# Altium PCB Bottom_PCB.PcbDoc
Units mm, origin at the board's own origin, x right, y up, seen from the top; angles counter-clockwise.
Board outline 56 x 75 mm, 2 copper layers (Top Layer, Bottom Layer); 35 components, 48 nets, 131 pads, 31 vias.
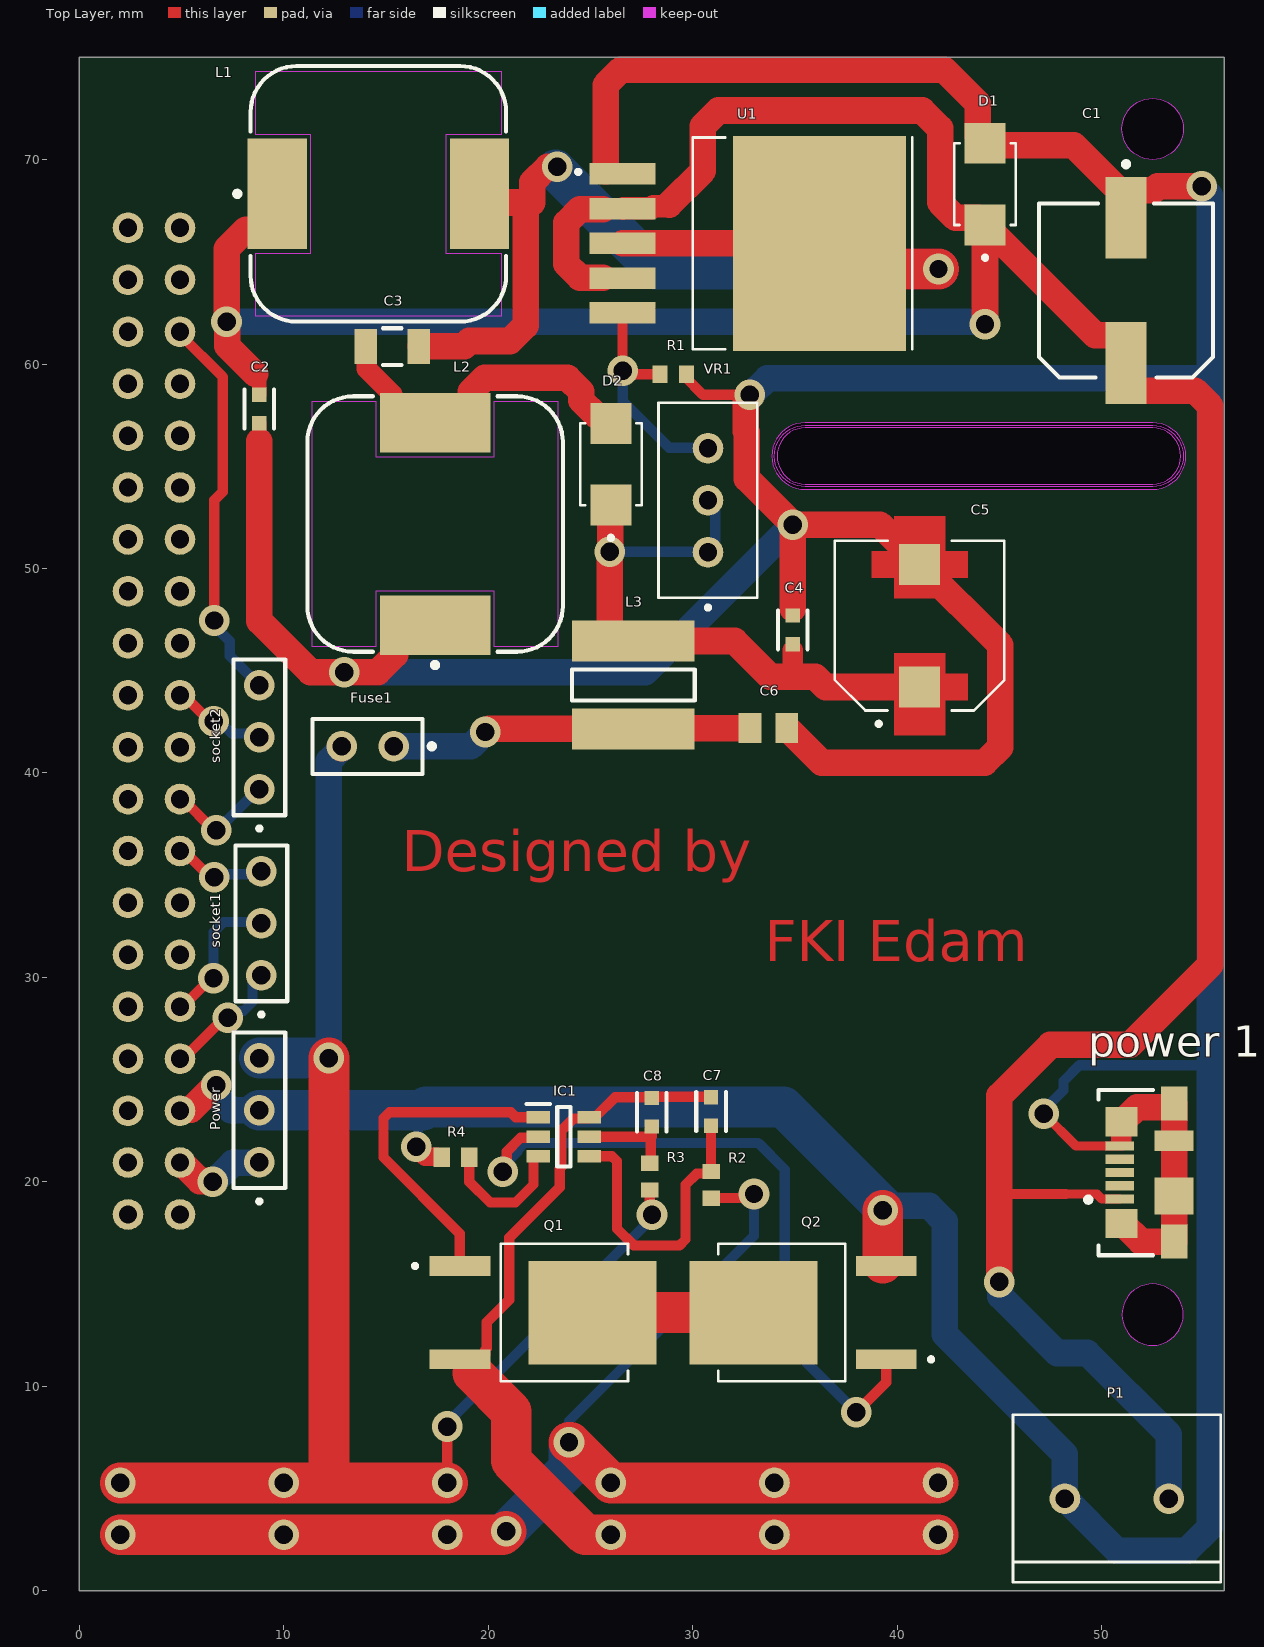
[diagram p0: Top Layer view]
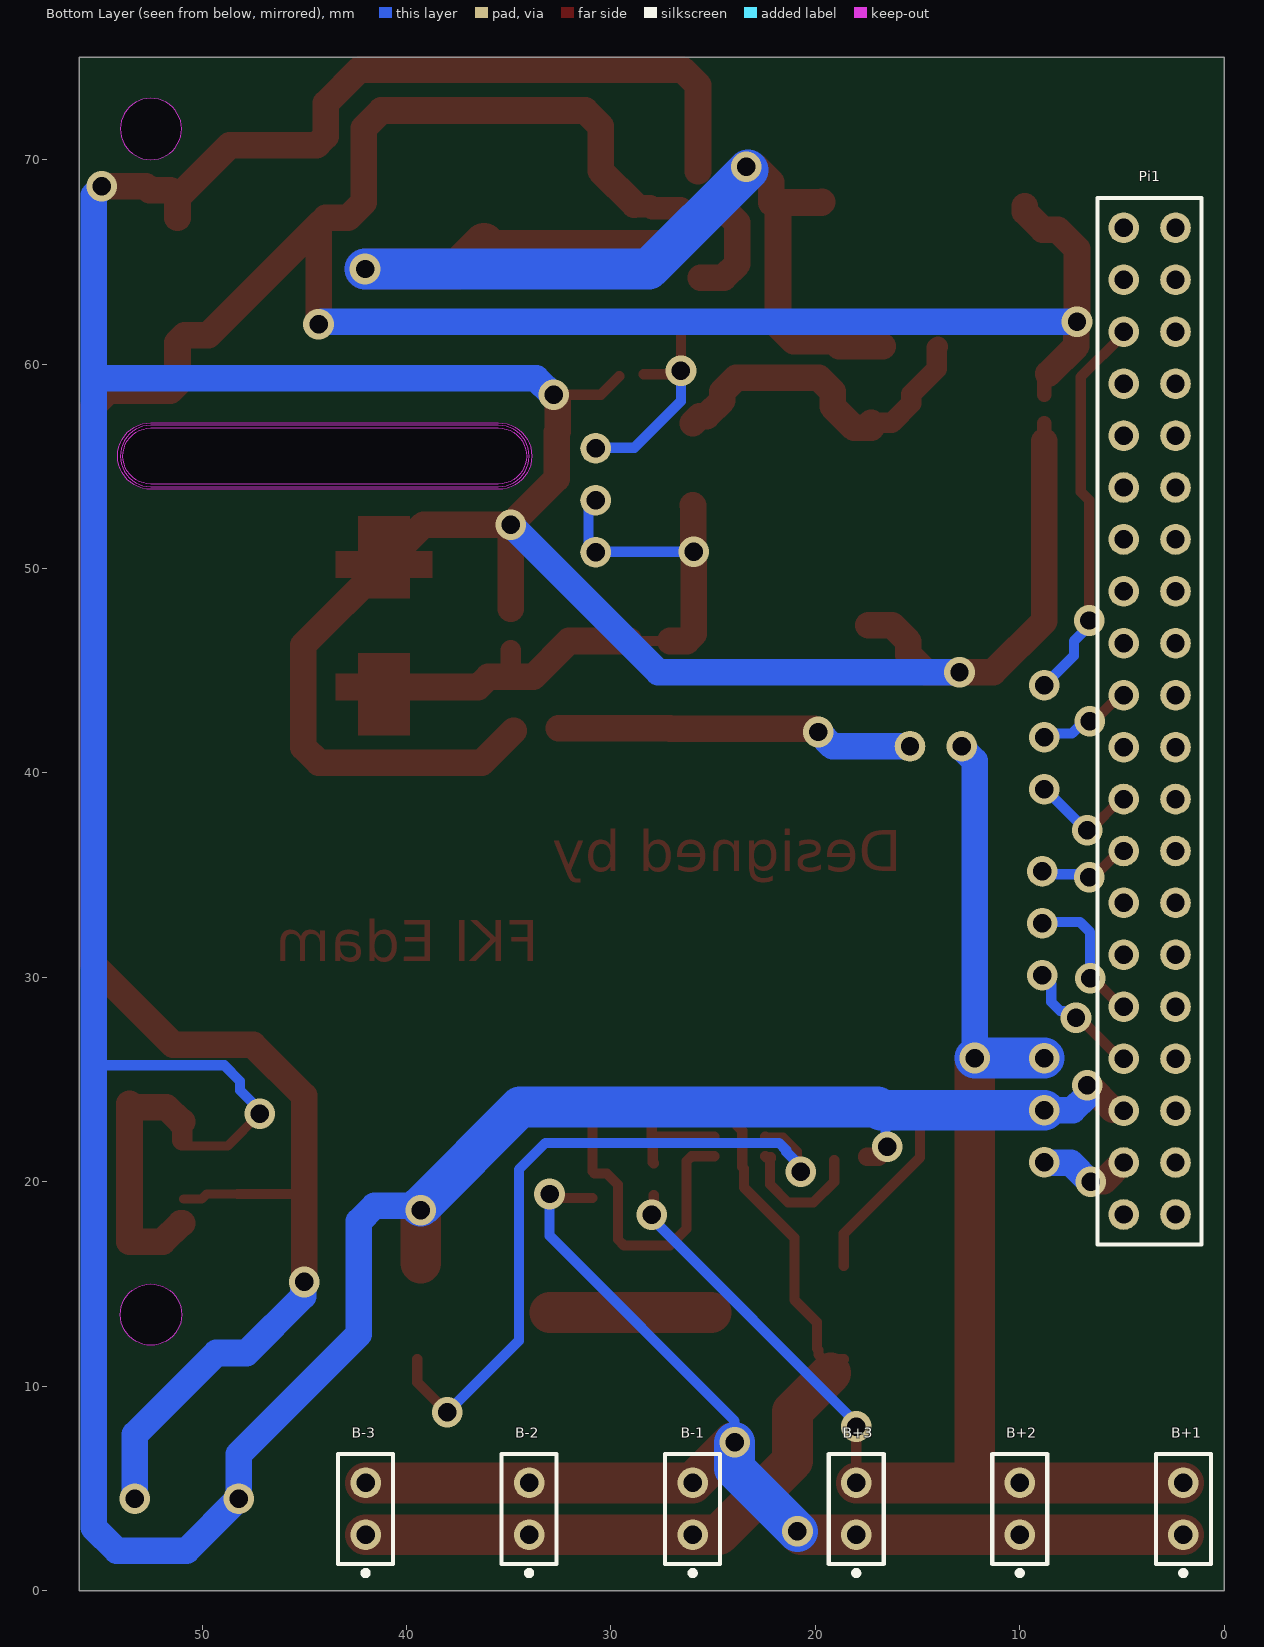
[diagram p1: Bottom Layer view, seen from below]
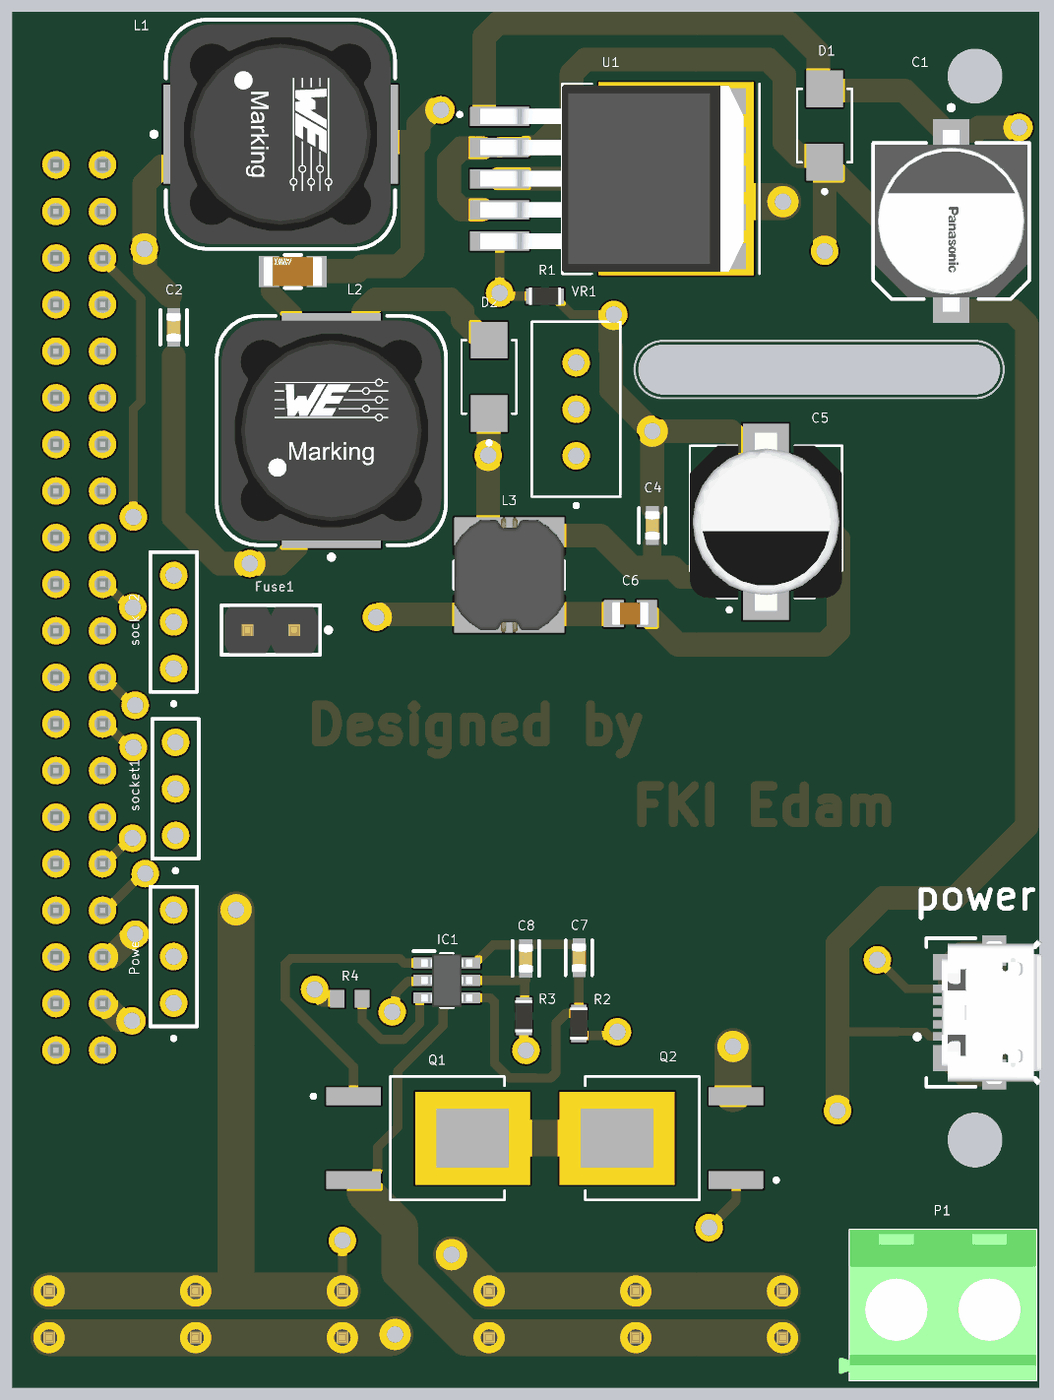
[diagram p2: 3D render of the assembled board from above, using the file's embedded part models]
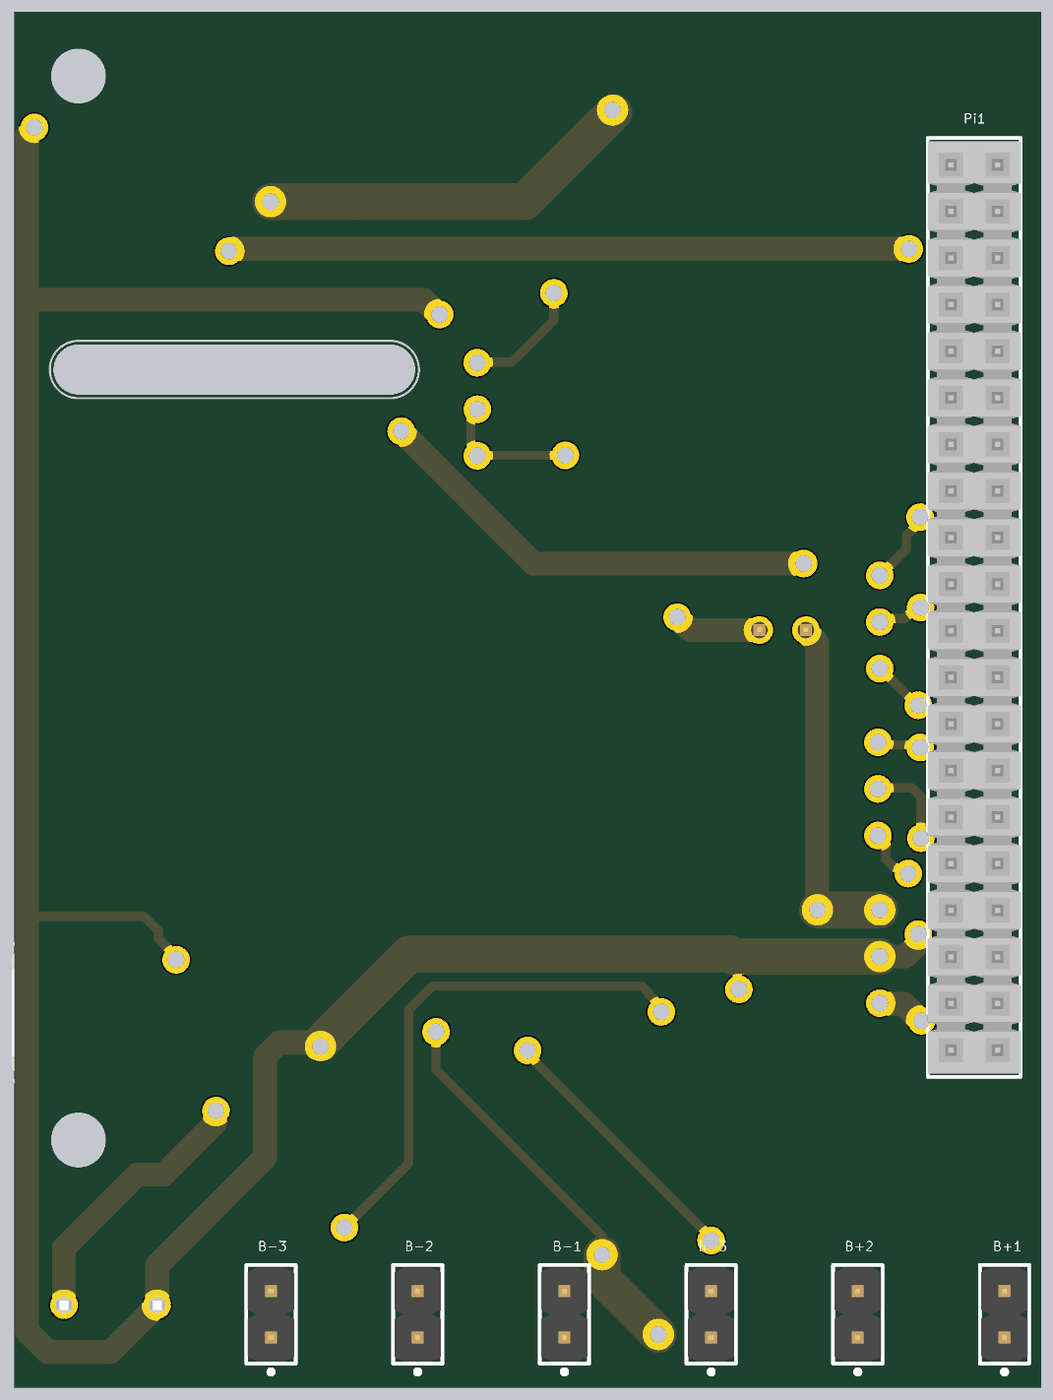
[diagram p3: 3D render of the assembled board from below, using the file's embedded part models]

## Layer stack, top to bottom
Top Solder: solder mask 0.0102, Solder Resist, Dk 3.5
Top Layer: signal copper 0.0356
Dielectric 1: dielectric 0.32, FR-4, Dk 4.8
Bottom Layer: signal copper 0.0356
Bottom Solder: solder mask 0.0102, Solder Resist, Dk 3.5

## Board outline
0,0 56,0 56,75 0,75
cut-out: 35.5,54.127 52.5,54.127 ccw(c52.5,55.5) 53.873,55.5 ccw(c52.5,55.5) 52.5,56.873 35.5,56.873 ccw(c35.5,55.5) 34.127,55.5 ccw(c35.5,55.5)
cut-out: 35.5,53.873 52.5,53.873 ccw(c52.5,55.5) 54.127,55.5 ccw(c52.5,55.5) 52.5,57.127 35.5,57.127 ccw(c35.5,55.5) 33.873,55.5 ccw(c35.5,55.5)
cut-out: 35.5,54 cw(c35.5,55.5) 34,55.5 cw(c35.5,55.5) 35.5,57 52.5,57 cw(c52.5,55.5) 54,55.5 cw(c52.5,55.5) 52.5,54
cut-out: 51,13.5 ccw(c52.5,13.5) 52.5,12 ccw(c52.5,13.5) 54,13.5 ccw(c52.5,13.5) 52.5,15 ccw(c52.5,13.5)
cut-out: 52.5,70 cw(c52.5,71.5) 51,71.5 cw(c52.5,71.5) 52.5,73 cw(c52.5,71.5) 54,71.5 cw(c52.5,71.5)

## Design rules (kind name [scope] priority, off if disabled: settings)
Clearance [All] p1: gap=0.3 ignorepadtopadclearanceinfootprint=FALSE except(0.2: Arc-SMDPad Track-SMDPad SMDPad-SMDPad)
HoleSize [All] p1: absolutevalues=TRUE maxlimit=0.9 minlimit=0.9 maxpercent=80.000 minpercent=20.000
MinimumSolderMaskSliver [All] p1: minsoldermaskwidth=0.1
PolygonConnect [All] p1: connectstyle=Relief reliefconductorwidth=0.254 reliefentries=4 polygonreliefangle="90 Angle" airgapwidth=0.254
RoutingVias [All] p1: holewidth=0.9 width=1.5 viastyle="Through Hole" minholewidth=0.9 minwidth=1.5 maxholewidth=0.9 maxwidth=1.5
SilkToSilkClearance [All] p1: silktosilkclearance=0.1
SilkToSolderMaskClearance [IsPad] p1: minsilkscreentomaskgap=0.1 clearancetoexposedcopper=TRUE
SolderMaskExpansion [All] p1: expansion=0.102 istentingtop=FALSE
SupplyNets "Schematic Supply Nets" [InNet('GND')] p1: voltage=0.000
UnRoutedNet [All] p1: checkbadconnections=TRUE
Width [All] p1: maxlimit=2 minlimit=0.45 preferedwidth=1.3
25 further rules are at their usual default settings.

## Classes and differential pairs
component class Bottom: B+1 B+2 B+3 B-1 B-2 B-3 C1 C2 C3 C4 C5 C6 C7 C8 D1 D2 Fuse1 IC1 L1 L2 L3 P1 Pi1 "power 1" Q1 Q2 R1 R2 R3 R4 U1 VR1

## Components (designator, comment, footprint, x,y, rotation, side; value= is the part's Value field where it differs from the comment)
B+1 "" 61300211121 2,4 r90 bottom
B+2 "" 61300211121 10,4 r90 bottom
B+3 "" 61300211121 18,4 r90 bottom
B-1 "" 61300211121 26,4 r90 bottom
B-2 "" 61300211121 34,4 r90 bottom
B-3 "" 61300211121 42,4 r90 bottom
C1 "220uF" FP-FPF-MFG 51.2,63.6 r270 top
C2 "100nF" FP-CGA3E-0_3-0_1-MFG 8.8,57.8 r90 top
C3 "22uF" FP-1206-L_3_2_0_2-W_1_6_0-IPC_C 15.3,60.85 r180 top
C4 "100nF" FP-CGA3E-0_3-0_1-MFG 34.9,47 r270 top
C5 "220uF" CAP_EEETC1V221UV 41.1,47.2 r90 top
C6 "10uF" CAPC2012X145N 33.7,42.2 r180 top
C7 "100nF" FP-CGA3E-0_3-0_1-MFG 30.9,23.438 r90 top
C8 "100nF" FP-CGA3E-0_3-0_1-MFG 28,23.4 r90 top
D1 "SS34" DIO_SS34 44.3,68.8 r90 top
D2 "SS34" DIO_SS34 26,55.1 r90 top
Fuse1 "61300211121" 61300211121 14.1,41.3 r180 top
IC1 "HY2120-AB" SOT95P280X140-6N 23.7,22.2 r0 top
L1 "470" WE-PD_1280 14.625,68.325 r270 top
L2 "470" WE-PD_1280 17.4,52.175 r0 top
L3 "2R2" BOUR-SRN6045_V 27.1,44.3 r270 top
P1 "282837-2" TE_282837-2 50.75,4.5 r0 top
Pi1 "TSW-120-24-F-D" SMTC-TSW-120-24-X-D 2.38,18.4 r90 bottom
Power "TSW-103-05-G-S-LL" SAMTEC_TSW-103-05-G-S-LL 8.8,20.96 r90 top
"power 1" "473460001" FP-473460001-MFG 53.2,20.45 r90 top
Q1 "AOD472" DPAK228P990X238-4N 22.68,13.6 r270 top
Q2 "AOD472" DPAK228P990X238-4N 35.4,13.6 r90 top
R1 "330" RESC1608X55X30LL15T15 29.05,59.5 r180 top
R2 "330" RESC1608X55X30LL15T15 30.9,19.85 r270 top
R3 "330" RESC1608X55X30LL15T15 27.9,20.25 r270 top
R4 "2K" RESC1608X55X30NL15T15 18.4,21.2 r0 top
socket1 "TSW-103-05-G-S-LL" SAMTEC_TSW-103-05-G-S-LL 8.9,30.1 r90 top
socket2 "TSW-103-05-G-S-LL" SAMTEC_TSW-103-05-G-S-LL 8.8,39.2 r90 top
U1 "XL6009" DPAK170P1435X465-6N 32.7,65.9 r0 top
VR1 "10K" TRIM_3296W1103LF 30.75,53.335 r90 top

## Footprints (in the part's own frame and the unit in brackets; to place one, negate y for a bottom-side part, rotate by r counter-clockwise, add the part's x,y. Pads: shape width x height; smd on the part's side, far side on the other; paste and mask are expansions set on the pad)
61300211121 [mm] "Pin Header, pitch 2.54 mm, THT, Vertical, single row, 2p"
  round 1.5 hole 0.9: 1(-1.27,0) 2(1.27,0)
  silkscreen extent -3.26,-1.35 2.69,1.35, body extent -2.54,-1.27 2.54,1.27, height 8.57
BOUR-SRN6045_V [mm] "SMD, 2-Leads, Body 6x6mm"
  rect 2x6 smd: 1(-2.15,0) 2(2.15,0)
  silkscreen extent -0.75,-3 0.75,3, body extent -3.15,-3 3.15,3, height 4.5
CAP_EEETC1V221UV [mm]
  rect 2x2 smd paste-2 mask+0: 1(-3,0) 2(3,0)
  Top Layer region: 3.65,1.25 5.35,1.25 5.35,-1.25 3.65,-1.25 3.65,-2.35 2.35,-2.35 2.35,-1.25 1.35,-1.25 1.35,1.25 2.35,1.25 2.35,2.35 3.65,2.35
  Top Layer region: -2.35,1.25 -1.35,1.25 -1.35,-1.25 -2.35,-1.25 -2.35,-2.35 -3.65,-2.35 -3.65,-1.25 -5.35,-1.25 -5.35,1.25 -3.65,1.25 -3.65,2.35 -2.35,2.35
  silkscreen extent -4.9,-4.15 4.15,4.15, body extent -4.85,-4.15 4.85,4.15, height 10.5
CAPC2012X145N [mm]
  rect 1.11x1.47 smd: 1(-0.9,0) 2(0.9,0)
  body extent -1,-0.63 1,0.63, height 1.45
DIO_SS34 [mm]
  rect 2x2 smd: A(2,0) C(-2,0)
  silkscreen extent -3.7,-1.5 2,1.5, body extent -2,-1.52 2,1.52, height 0.25
DPAK170P1435X465-6N [mm]
  rect 3.21x1.05 smd: 1(-6.13,3.4) 2(-6.13,1.7) 3(-6.13,0) 4(-6.13,-1.7) 5(-6.13,-3.4)
  rect 8.46x10.53 smd paste-6: 6(3.5,0)
  silkscreen extent -8.4,-5.18 8.05,5.18, body extent -7.17,-5.08 7.17,5.08, height 4.65
DPAK228P990X238-4N [mm]
  rect 0.97x2.98 smd: 1(-2.286,-4.07) 3(2.286,-4.07)
  rect 5.07x6.27 smd paste-4: 4(0,2.42)
  silkscreen extent -3.37,-6.36 3.37,4.16
FP-1206-L_3_2_0_2-W_1_6_0-IPC_C [mm]
  rect 1.105x1.706 smd paste+0 mask+0: 1(-1.301,0) 2(1.301,0)
  silkscreen extent -0.45,-0.9 0.45,0.9, body extent -1.95,-1 1.95,1, height 0.25
FP-473460001-MFG [mm]
  rect 0.45x1.38 smd paste+0 mask+0: 1(-1.3,2.31) 2(-0.65,2.31) 3(0,2.31) 4(0.65,2.31) 5(1.3,2.31)
  rect 1.425x1.55 smd paste+0 mask+0: 6(-2.488,2.225) 7(2.488,2.225)
  rect 1.65x1.3 smd paste+0 mask+0: 8(-3.375,-0.35) 11(3.375,-0.35)
  rect 1.8x1.9 smd paste+0 mask+0: 9(-1.15,-0.35)
  rect 1x1.9 smd paste+0 mask+0: 10(1.55,-0.35)
  silkscreen extent -4.05,0.67 4.05,3.97, body extent -4.3,-2.48 4.3,3.45, height 0.25
FP-CGA3E-0_3-0_1-MFG [mm]
  rect 0.7x0.7 smd paste+0 mask+0: 1(-0.7,0) 2(0.7,0)
  silkscreen extent -0.95,-0.72 0.95,0.72, body extent -1.15,-0.65 1.15,0.65, height 0.25
FP-FPF-MFG [mm]
  rect 4x2 smd paste+0 mask+0: 1(-3.55,0) 2(3.55,0)
  silkscreen extent -6.3,-4.25 4.25,4.25, body extent -5.8,-4.5 5.8,4.5, height 0.25
RESC1608X55X30LL15T15 [mm] "Chip Resistor, 2-Leads, Body 1.75x0.95mm, IPC High Density"
  rect 0.75x0.85 smd: 1(-0.65,0) 2(0.65,0)
  body extent -0.87,-0.48 0.87,0.48, height 0.55
RESC1608X55X30NL15T15 [mm] "Chip Resistor, 2-Leads, Body 1.60x0.80mm, IPC Medium Density"
  rect 0.8x0.95 smd: 1(-0.675,0) 2(0.675,0)
  body extent -0.87,-0.48 0.87,0.48, height 0.55
SAMTEC_TSW-103-05-G-S-LL [mm]
  round 1.5 hole 0.9: 01(0,0) 02(2.54,0) 03(5.08,0)
  silkscreen extent -2.02,-1.27 6.35,1.27
SMTC-TSW-120-24-X-D [mm] ".025 SQ Post Terminal Strip Assembly, 2x20 Pins, Vertical, 2.54mm Pitch, Male"
  round 1.5 hole 0.9: 1(0,0) 2(0,2.54) 3(2.54,0) 4(2.54,2.54) 5(5.08,0) 6(5.08,2.54) 7(7.62,0) 8(7.62,2.54) 9(10.16,0) 10(10.16,2.54) 11(12.7,0) 12(12.7,2.54) 13(15.24,0) 14(15.24,2.54) 15(17.78,0) 16(17.78,2.54) 17(20.32,0) 18(20.32,2.54) 19(22.86,0) 20(22.86,2.54) 21(25.4,0) 22(25.4,2.54) 23(27.94,0) 24(27.94,2.54) 25(30.48,0) 26(30.48,2.54) 27(33.02,0) 28(33.02,2.54) 29(35.56,0) 30(35.56,2.54) 31(38.1,0) 32(38.1,2.54) 33(40.64,0) 34(40.64,2.54) 35(43.18,0) 36(43.18,2.54) 37(45.72,0) 38(45.72,2.54) 39(48.26,0) 40(48.26,2.54)
  silkscreen extent -1.46,-1.27 49.72,3.81, body extent -1.27,-1.27 49.53,3.81, height 9.27
SOT95P280X140-6N [mm]
  rect 1.15x0.6 smd: 1(-1.25,0.95) 2(-1.25,0) 3(-1.25,-0.95) 4(1.25,-0.95) 5(1.25,0) 6(1.25,0.95)
  silkscreen extent -1.83,-1.45 0.33,1.6, body extent -1.4,-1.45 1.4,1.45, height 1.4
TE_282837-2 [mm]
  round 1.5 hole 0.9: 1(-2.54,0) 2(2.54,0)
  silkscreen extent -5.08,-4.1 5.08,4.1, body extent -5.68,-4.1 5.08,4.1, height 10
TRIM_3296W1103LF [mm]
  round 1.5 hole 0.9: 1(-2.54,0) 2(0,0) 3(2.54,0)
  silkscreen extent -5.35,-2.41 4.76,2.42
WE-PD_1280 [mm] "SMT Shielded Power Inductor, 2-leads, body 12x12mm"
  rect 5.4x2.9 smd: 1(0,-4.95) 2(0,4.95)
  Top Layer keep-out region: -6,6 -2.9,6 -2.9,3.3 2.9,3.3 2.9,6 6,6 6,-6 2.9,-6 2.9,-3.3 -2.9,-3.3 -2.9,-6 -6,-6
  silkscreen extent -6.25,-7.02 6.25,6.25, body extent -6,-6 6,6, height 7.51

## Part data
B+1 B+2 B+3 B-1 B-2 B-3 Fuse1: library part CMP-1712-00002-6, Color=Black, Contact Resistance=20mΩ, Current Rating=3A, Max Operating Temperature=125°C, Min Operating Temperature=-40°C, Operating Supply Voltage=250V, Connector Type="Male Pin", Contact Gender=Male, Contact Material=Copper, Contact Mating Length=5.9944mm, Contact Plating=Gold, Gender=Male, Height=8.94mm, Housing Material=PBT, Lead Free="Lead Free", Lead Pitch=2.54mm, Mount="Through Hole", NexarPartId=20081794, Number of Contacts=2, Number of Pins=2, Number of Positions=2, Number of Rows=1, Orientation=Vertical, Packaging=Bulk, Pitch=2.54mm, REACH SVHC="No SVHC", RoHS=Compliant, Termination="Through Hole", Voltage Rating=250V
C1: library part CMP-2000-06215-2, "CAP ALUM 220UF 20% 35V SMD", Case/Package=Radial, ESR (Equivalent Series Resistance)=80mR, Leakage Current=77uA, Max Operating Temperature=105°C, Min Operating Temperature=-55°C, Package Quantity=500, Ripple Current=850mA, Tolerance=20%, Voltage=35V, Capacitance=220uF, Construction=Cylindrical, Contact Plating=Tin, Diameter=8mm, Height=10.2mm, Height - Seated (Max)=0.402inch, Lead Free="Lead Free", Lead Pitch=3.1mm, Length=10.5mm, Life (Hours)=2000Hour, Material=Aluminium, Mount="Surface Mount", Number of Pins=2, Packaging="Tape and Reel", Polarity=Polar, Radiation Hardening=No, REACH SVHC="No SVHC", Ripple Current (AC)=850mA, RoHS Compliant=Yes, Series=FP, Termination=SMD/SMT, Voltage Rating=35V, Voltage Rating (DC)=35V, Width=8.3mm
C2 C4 C7 C8: library part CMP-2000-07546-2, "Cap Ceramic 100nF 50V X7R 10% Pad SMD 0603 +125°C Automotive T/R", Case Code (Imperial)=0603, Case Code (Metric)=1608, Dielectric=X7R, Max Operating Temperature=125°C, Min Operating Temperature=-55°C, Package Quantity=1, Ratings=AEC-Q200, Tolerance=10%, Voltage=50V, Capacitance=100nF, Case/Package=0603, Composition=Ceramic, Depth=0.8mm, Height=0.8mm, Lead Free="Lead Free", Length=1.6mm, Mount="Surface Mount", Packaging="Tape and Reel", Radiation Hardening=No, REACH SVHC="No SVHC", Termination=SMD/SMT, Thickness=0.035inch, Voltage Rating=50V, Voltage Rating (DC)=50V, Weight=7.1E-05oz, Width=0.8mm
C3: library part CMP-1037-04985-3, "CAP CER 22UF 6.3V X7R 1206", Case Code (Imperial)=1206, Case Code (Metric)=3216, Dielectric=X7R, Max Operating Temperature=125°C, Min Operating Temperature=-55°C, Package Quantity=2500, Tolerance=10%, Voltage=6.3V, Capacitance=22uF, Case/Package=1206, Construction=Flat, Contact Plating=Tin, Depth=1.6mm, Dissipation Factor=5%, Height=1.78mm, Lead Free="Lead Free", Length=3.2mm, Mount="Surface Mount", Number of Pins=2, Packaging="Tape and Reel", Radiation Hardening=No, REACH SVHC="No SVHC", RoHS Compliant=Yes, Series=FlEXITERM, Termination=SMD/SMT, Thickness=0.07inch, Voltage Rating=6.3V, Voltage Rating (DC)=6.3V, Width=1.6mm
C5: library part EEETC1V221UV, "CAP ALUM 220UF 20% 35V SMD", Package="RADIAL-2 Panasonic", Availability="In Stock", Check_prices=https://www.snapeda.com/parts/EEE-TC1V221UV/Panasonic/view-part/6178608/?ref=eda, MF="Panasonic Electronic Components", MP=EEE-TC1V221UV, Price=None, Purchase-URL=https://pricing.snapeda.com/search/part/EEE-TC1V221UV/?ref=eda, SnapEDA_Link=https://www.snapeda.com/parts/EEE-TC1V221UV/Panasonic/view-part/6178608/?ref=snap
C6: library part GRM21BC8YA106ME11L, "0805 10 uF 35 V Â±% 20 Tolerans X6S Ã‡ok KatmanlÄ± Seramik KondansatÃ¶r", Package="2012 Murata", Availability=Good, Check_prices=https://www.snapeda.com/parts/GRM21BC8YA106ME11L/Murata%20Electronics%20North%20America/view-part/1765835/?ref=eda, MF=Murata, MP=GRM21BC8YA106ME11L, Price=None, Purchase-URL=https://pricing.snapeda.com/search/part/GRM21BC8YA106ME11L/?ref=eda, SnapEDA_Link=https://www.snapeda.com/parts/GRM21BC8YA106ME11L/Murata%20Electronics%20North%20America/view-part/1765835/?ref=snap
D1 D2: library part CMP-004-00031-2, "3A, 40V, Schottky Rectifier", Case/Package="DO-214AB-2 Taiwan Semiconductor", Check_prices=https://www.snapeda.com/parts/SS34/Taiwan+Semiconductor/view-part/?ref=eda, Component Type=Standard, Design Item ID=SS34, MF="Taiwan Semiconductor", MP=SS34, Pins=2, SnapEDA_Link=https://www.snapeda.com/parts/SS34/Taiwan+Semiconductor/view-part/?ref=snap, Source=SS34.SchLib
IC1: "Integrated Circuit", Manufacturer_Name="HYCON Tech", Datasheet Link=https://datasheet.lcsc.com/szlcsc/Fortune-Semicon-FS8205A_C16052.pdf, Height=1.4mm, Manufacturer_Part_Number=HY2120-AB
L1 L2: library part CMP-0227-00205-2, Ambient Temperature Range High=85°C, Ambient Temperature Range Low=-40°C, Case/Package=Nonstandard, Current Rating=3A, DC Resistance (DCR)=53mΩ, Inductance=47µH, Inductance Tolerance=20%, Max DC Current=2.7A, Max Operating Temperature=125°C, Resistance=100mΩ, Self Resonant Frequency=7.9MHz, Test Frequency=1kHz, Composition=Wirewound, Core Material=Ferrite, Depth=12mm, Height=8mm, Height - Seated (Max)=8.001mm, Lead Free="Lead Free", Lead Pitch=7mm, Length=12mm, Min Operating Temperature=-40°C, Mount="Surface Mount", NexarPartId=8917149, Number of Pins=2, Packaging="Cut Tape (CT)", REACH SVHC=Unknown, RMS Current (Irms)=2.7A, RoHS=Compliant, Saturation Current=3A, Series Resistance=100mΩ, Shielding=Shielded, Termination=SMD/SMT, Tolerance=20%, Weight=4.535924g, Width=12mm
L3: library part CMP-2000-07142-1, "Semi-Shielded Power Inductor, 2.2 uH, +/- 30%, 3.5 A, -40 to 125 degC, 2-Pin SMD, RoHS, Tape and Reel", Current - Saturation=6A, Current Rating=3.5A, DC Resistance (DCR)=25.1mOhmMax, Frequency - Self Resonant=35MHz, Frequency - Test=100kHz, Inductance=2.2µH, Manufacturer=Bourns, Operating Temperature=-40°C~125°C, Package / Case=Nonstandard, Package Description="2-Pin Surface Mounted Device, Body 6 x 6 mm", Package Reference=SRN6045, Q @ Freq=15@7.96MHz, Standard Package=1, Tolerance=±30%, 3D Model=SRN6045.stp, Category=Inductors,Coils,Chokes, Datasheet URL=http://www.bourns.com/docs/Product-Datasheets/SRN6045.pdf, Datasheet Version=12/2014, EDA / CAD Models=DownloadfromAcceleratedDesigns, Family=FixedInductors, Height - Seated (Max)="0.177\"(4.50mm)", Kits="SRN-LAB1-ND / -INDUCTORKIT", Manufacturer URL=http://www.bourns.com/, Material - Core=Ferrite, Mounting Technology=SurfaceMount, Mounting Type=SurfaceMount, Online Catalog=SRNSeries, Other Names=SRN6045-2R2YCT, Packaging=CutTape(CT), PCN Assembly/Origin=MagneticproductsOct/2013, Product Training Modules=SRNSeries:Semi-ShieldedInductors, RoHS Information=SRN6045SeriesMaterialDeclaration, Series=SRN6045, Shielding=Shielded, Size / Dimension="0.236\"Lx0.236\"W(6.00mmx6.00mm)", Type=Wirewound
P1: library part CMP-005-000000-1, "Ð Ð°Ð·ÑŠÐµÐ¼Ð½Ñ‹Ðµ ÐºÐ»ÐµÐ¼Ð¼Ð½Ñ‹Ðµ ÐºÐ¾Ð»Ð¾Ð´ÐºÐ¸ Ð Ð¾Ð·ÐµÑ‚ÐºÐ° 2 Ð¿Ð¾Ð»Ð¾Ð¶ÐµÐ½Ð¸Ñ 5,08 Ð¼Ð¼ ÐŸÑ€Ð¸Ð¿Ð¾Ð¹ Ð¿Ñ€ÑÐ¼Ð¾Ð¹ Ñ‡ÐµÑ€ÐµÐ· Ð¾Ñ‚Ð²ÐµÑ€ÑÑ‚Ð¸Ðµ 13,5 Ð / ÐºÐ¾Ð½Ñ‚Ð°ÐºÑ‚", Package=None, Availability="In Stock", Check_prices=https://www.snapeda.com/parts/282837-2/TE+Connectivity+AMP+Connectors/view-part/?ref=eda, Component Type=Standard, Design Item ID=282837-2, MF="TE Connectivity", MP=282837-2, Pin Count=2, Price=None, Purchase-URL=https://pricing.snapeda.com/search/part/282837-2/?ref=eda, SnapEDA_Link=https://www.snapeda.com/parts/282837-2/TE+Connectivity+AMP+Connectors/view-part/?ref=snap, Source=282837-2.SchLib
Pi1: library part CMP-1024-00453-1, "0.025\" SQ Post Header, Through-hole, Vertical, -55 to 125 degC, 2.54 mm Pitch, 40-Pin, Male, RoHS", Manufacturer=Samtec, Temperature Range="-55 to 125 degC", ComponentLink1Description="Manufacturer URL", ComponentLink1URL=http://www.samtec.com, ComponentLink2Description=Datasheet, ComponentLink2URL=http://www.samtec.com/documents/webfiles/pdf/TSW_TH.PDF, ComponentLink3Description="Package Specification", ComponentLink3URL=http://www.samtec.com/documents/webfiles/cpdf/TSW-XXX-XX-XXX-X-XX-XXX-MKT.pdf, DatasheetVersion=F-214, Mounting Technology=Through-hole, Orientation=Vertical, PackageDescription=".025[0.64] SQ. Post Terminal Strip Assembly", PackageReference=TSW-120-24-X-D, PackageVersion="DM, 8/1988", PartNumber=TSW-120-24-F-D, Pitch="2.54 mm", RoHS=True
Power socket1 socket2: Package=None, Availability=Unavailable, MP=TSW-103-05-G-S-LL, Price=None
"power 1": library part CMP-2000-05246-2, "CONN RCPT USB2.0 MICRO B SMD R/A", Current Rating=1.8A, Manufacturer=Molex, Package=0, Temperature="-30°C to +85°C", Temperature Range High=+85°C, Temperature Range Low=-30°C, Voltage Rating=30V, Automotive=No, Category=Conn, ComponentLink2Description=Datasheet, ComponentLink2URL=https://www.molex.com/webdocs/datasheets/pdf/en-us/0473460001_IO_CONNECTORS.pdf, Conn Orientation="Right Angle", Contact Material=Gold,Nickel, Device Class L1=Connectors, Device Class L2="USB Connectors", Device Class L3=unset, Digikey Description="CONN RCPT USB2.0 MICRO B SMD R/A", Footprint Url=https://www.molex.com/pdm_docs/sd/473460001_sd.pdf, Height=2.945mm, Is Female=yes, Lead Free=Yes, Manufacturer Part Number=473460001, Number of Contacts=5, Octopart=https://octopart.com/47346-0001-molex-7164928, Pitch=0.65mm, RoHS=TRUE, Shielding=true, USB Standard="USB 2.0"
Q1 Q2: library part AOD472-VB, Drain Source On Resistance (RDS(on)@Vgs,Id)=6mΩ@4.5V,65A, Gate Threshold Voltage (Vgs(th)@Id)=-, JLCPCB Part Class="Extended Part", LCSC Part Name="1个N沟道 耐压:20V 电流:65A", Manufacturer=VBsemi(微碧半导体), Add into BOM=yes, Convert to PCB=yes, Datasheet=https://atta.szlcsc.com/upload/public/pdf/source/20230505/3F73ADF2DE3058DC47170F0DD3B592B7.pdf, Device=AOD472-VB, Input Capacitance (Ciss@Vds)=-, Manufacturer Part=AOD472-VB, Power Dissipation (Pd)=-, Reverse Transfer Capacitance (Crss@Vds)=-, Supplier=LCSC, Supplier Footprint=TO-252-2, Supplier Part=C693172, Symbol=AOD472, Total Gate Charge (Qg@Vgs)=-, Type=1个NChannel
R1 R2 R3: library part CMP-2000-00435-2, "Chip Resistor, 330 Ohm, +/- 1%, 0.1 W, -55 to 155 degC, 0603 (1608 Metric), RoHS, Tape and Reel", Current Rating="500 mA", Max Operating Temperature="85 degC", Min Operating Temperature="-25 degC", Package Quantity=1500, Voltage Rating="10 V", ComponentLink1Description="Manufacturer URL", ComponentLink1URL=http://www.panasonic.com/, ComponentLink2Description=Datasheet, ComponentLink2URL=http://industrial.panasonic.com/cdbs/www-data/pdf/RDA0000/AOA0000C86.pdf, Contact Finish=Gold, Contact Material=Copper, Contact Plating=Gold, DatasheetVersion=Apr-15, Gender=Male, Height="1.45 mm", Lead Pitch="1.1 mm", Length="13.7 mm", Mating Cycles=10000, Mount="Surface Mount", PackageDescription="2-Pin Surface Mount Device, Body 1.6 x 0.85 mm", PackageReference=0603, Packaging="Tape and Reel", Pins=8, REACH SVHC="No SVHC", RoHSCompliant=true, Width="1.45 mm"
R4: library part CMP-2000-00317-1, Manufacturer=Panasonic, Part Number=ERJ-3EKF2001V
U1: library part CMP-003-000000-1, "The XL6009 regulator is a wide input range, current mode, DC/DC converter which is capable of generating either positive or negative output voltages.", Package="TO-263-5L XLSEMI", Availability="Not in stock", Check_prices=https://www.snapeda.com/parts/XL6009/XLSEMI/view-part/?ref=eda, Component Type=Standard, Design Item ID=XL6009, MF=XLSEMI, MP=XL6009, Pin Count=6, Price=None, SnapEDA_Link=https://www.snapeda.com/parts/XL6009/XLSEMI/view-part/?ref=snap, Source=XL6009.SchLib
VR1: library part 3296W1103LF, "Trimmer, Potentiometer 10kohm 25turn Thd", Package=None, Availability=Unavailable, Check_prices=https://www.snapeda.com/parts/3296W1103LF/Bourns/view-part/2487625/?ref=eda, MF=Bourns, MP=3296W1103LF, Price=None, SnapEDA_Link=https://www.snapeda.com/parts/3296W1103LF/Bourns/view-part/2487625/?ref=snap

## Via types
v1: diameter 1.5, hole 0.9, Top Layer to Bottom Layer, 31 vias

## Nets (pads, with @x,y where several pads share a name; then routed paths per layer and width w, separated by ;. In a path a pad name is that pad's centre, name@x,y a point inside that pad or via, vN(x,y) a via of type N, cw(c..) or ccw(c..) an arc to the next point about the centre after c; other vN are vias at no path point)
GND: "power 1.5" "power 1.6" "power 1.7" "power 1.8" "power 1.9" "power 1.10" "power 1.11" C1.1 C2.1 C4.1 C5.2 C6.1 D1.A L2.1 P1.1 Pi1.6 Power.02 Q2.3 R1.1 R4.1 U1.1 | length 315.5
  Top Layer w0.45: v1(47.175,23.325) 48.75,21.75 50.89,21.75
  Top Layer w0.5: R1.1@29.575,59.4 29.6,59.4 30.5,58.5 v1(32.8,58.5)
  Top Layer w0.7: 8.8,56.225 C2.1
  Top Layer w0.9: v1(16.486,21.711) 16.486,21.652 16.912,21.225 R4.1@17.475,21.225
  Top Layer w1: 50.975,22.025 50.975,22.938
  Top Layer w1.3: Pi1.6 4.958,23.518 5.439,23.518 6.646,24.725 v1(6.7,24.725) ; Power.02@8.79,23.49 Power.02 ; 8.8,56.225 8.8,47.431 11.306,44.925 v1(12.95,44.925) 14.594,44.925 15.45,45.781 15.45,46.425 16.25,47.225 L2.1 ; U1.1@25.74,69.425 25.74,73.638 26.502,74.4 42.3,74.4 43.95,72.75 43.95,71.15 D1.A 44.4,70.7 48.65,70.7 C1.1@51.2,68.15 ; v1(32.8,58.5) 32.8,58.446 32.6,58.246 32.6,56.712 32.65,56.662 32.65,54.392 v1(34.9,52.142) ; C6.1@34.755,42.055 36.31,40.5 44.288,40.5 45.05,41.262 45.05,46.25 C5.2 39.158,52.142 v1(34.9,52.142) ; C4.1@34.9,48.025 v1(34.9,52.142) ; v1(47.175,23.325) v1@47.229,23.325 ; 50.975,17.962 51.038,17.962 51.925,17.075 53.55,17.075 53.55,19.3 53.55,22 53.55,23.65 ; 50.975,22.938 51.038,22.938 51.75,23.65 53.55,23.65 ; C1.1 C1.1@51.2,68.15 ; 53.55,23.825 53.55,23.65 ; v1(54.9,68.7) 52.75,68.7 52.55,68.5 51.55,68.5 C1.1@51.2,68.15
  Top Layer w2: Q2.3@39.3,16.031 v1(39.3,18.6)
  Bottom Layer w0.5: v1(16.486,21.711) 16.566,21.791 16.566,22.624 16.8,22.858 16.8,23.5 ; v1(47.175,23.325) 47.175,23.512 48.142,24.479 48.142,24.924 48.918,25.7 55.3,25.7
  Bottom Layer w1.3: v1(6.7,24.725) 6.738,24.687 6.738,24.173 7.412,23.5 Power.02 ; v1(12.95,44.925) 27.683,44.925 v1(34.9,52.142) ; v1(32.8,58.5) 32.854,58.5 33.654,59.3 55.3,59.3 ; v1(39.3,18.6) 39.525,18.825 41.563,18.825 42.325,18.063 42.325,12.55 48.21,6.665 P1.1 50.76,1.95 54.163,1.95 55.3,3.087 55.3,25.7 55.3,59.3 ; v1(54.9,68.7) 54.9,68.646 55.3,68.246 55.3,59.3
  Bottom Layer w2: Power.02 16.8,23.5 16.95,23.65 34.45,23.65 v1@39.3,18.8
NetB+1_1: B+1.1 B+2.1 B+3.1 B-1.2 B-2.2 B-3.2 R2.2 | length 61.3
  Top Layer w0.5: R2.2 32.529,19.2 v1@32.729,19.4
  Top Layer w2: B+1.1 B+2.1 B+3.1 20.705,2.73 v1(20.875,2.9) ; v1(23.95,7.25) 24.02,7.25 B-1.2 B-2.2 B-3.2
  Bottom Layer w0.5: v1(23.95,7.25) 23.95,8.3 33,17.35 v1(33,19.4)
  Bottom Layer w2: v1(20.875,2.9) 23.95,5.975 v1(23.95,7.25)
NetB+1_2: B+1.2 B+2.2 B+3.2 Fuse1.2 Power.03 R3.2 | length 74.1
  Top Layer w0.5: B+3.2 v1(18,8.025) ; R3.2@27.9,19.35 27.9,18.494 v1(28.009,18.385)
  Top Layer w1.3: Fuse1.2@12.83,41.219 Fuse1.2
  Top Layer w2: B+1.2 B+2.2 12.175,5.27 ; v1(12.202,26.05) 12.202,5.297 12.175,5.27 ; B+3.2 12.175,5.27
  Bottom Layer w0.5: v1(18,8.025) 18,8.201 28.009,18.209 v1(28.009,18.385)
  Bottom Layer w1.3: Power.03 Power.03@8.805,26.045 ; v1@12.197,26.045 v1(12.202,26.05) 12.202,40.59 12.83,41.219 Fuse1.2
  Bottom Layer w2: Power.03@8.805,26.045 v1@12.197,26.045
NetB-1_1: B-1.1 B-2.1 B-3.1 C7.2 C8.2 IC1.6 Q1.3 | length 49.3
  Top Layer w0.5: Q1.3@18.614,11.318 19.619,11.318 19.85,11.549 19.85,11.767 19.925,11.842 19.925,13.125 21.025,14.225 21.025,17.26 23.495,19.73 23.495,20.642 23.575,20.722 23.575,22.5 24.175,23.1 24.9,23.1 IC1.6 25.225,23.15 26.213,24.138 28,24.138 28.019,24.157 C7.2@30.881,24.157
  Top Layer w2: 19.244,10.637 21.125,8.756 21.125,6.35 24.745,2.73 B-2.1 B-3.1
NetC1_2: "power 1.1" C1.2 C2.2 D1.C L1.1 P1.2 U1.2 U1.4 | length 171.1
  Top Layer w0.45: 48.25,19.4 49.774,19.4 50.024,19.15 50.89,19.15
  Top Layer w0.5: 8.6,59.525 8.8,59.325 ; 45,19.4 48.25,19.4
  Top Layer w0.7: C2.2 8.8,59.325
  Top Layer w1.1: U1.2 26.595,67.625 27.983,67.625 28.083,67.725 28.61,67.725 28.685,67.8 28.85,67.8
  Top Layer w1.3: 8.6,59.525 7.234,60.891 7.234,62.041 v1(7.2,62.075) 7.2,65.626 8.149,66.575 8.875,66.575 9.748,67.448 L1.1@9.748,67.727 ; U1.4@25.615,64.225 24.489,64.225 23.815,64.899 23.815,66.901 24.489,67.575 U1.2@25.615,67.575 ; 28.85,67.8 30.5,69.45 30.5,71.638 31.262,72.4 41.225,72.4 42.1,71.525 42.1,67.912 42.862,67.15 43.95,67.15 D1.C ; v1(44.3,61.95) D1.C ; v1(45,15.1) 45,19.4 45,20.75 45,21.8 45,24.2 47.5,26.7 51.4,26.7 55.325,30.625 55.325,57.938 54.563,58.7 51.55,58.7 51.2,59.05 C1.2 51.2,61.05 50.85,61.4 49.7,61.4 D1.C
  Bottom Layer w1.3: v1(7.2,62.075) 44.121,62.075 44.246,61.95 v1(44.3,61.95) ; v1(45,15.1) 45.05,15.05 45.05,14.4 47.825,11.625 49.3,11.625 53.29,7.635 P1.2
NetC3_1: C3.1 L1.2 U1.3 U1.6 | length 53.1
  Top Layer w1.3: C3.1@16.698,60.875 18.828,60.875 19.078,61.125 21.063,61.125 21.825,61.887 21.825,67.75 ; L1.2@19.675,67.925 19.7,67.9 22.15,67.9 22.15,68.888 22.912,69.65 v1(23.375,69.65) ; U1.3 U1.6
  Top Layer w2: U1.6 37.45,64.65 v1(42.025,64.65)
  Bottom Layer w2: v1@23.3,69.5 28.15,64.65 v1(42.025,64.65)
NetC3_2: C3.2 D2.A L2.2 | length 17.5
  Top Layer w1: C3.2 14.052,60.798 14.052,59.773 15.3,58.525 15.3,58.075 16.25,57.125 L2.2 L2.2@17.275,57.125
  Top Layer w1.3: L2.2@17.275,57.125 17.275,56.875 18.1,56.875 19.15,57.925 19.15,58.651 19.824,59.325 23.876,59.325 24.55,58.651 24.55,58.225 25.325,57.45 25.65,57.45 D2.A
NetC4_2: C4.2 C5.1 D2.C L3.1 VR1.1 VR1.2 | length 31.5
  Top Layer w0.5: L3.1 L3.1@29.1,46.45
  Top Layer w1: 34.9,44.7 C4.2@34.9,46
  Top Layer w1.3: D2.C 25.975,53.075 25.975,50.85 v1(25.95,50.825) 25.95,46.8 26.3,46.45 L3.1 ; L3.1@29.1,46.45 32.05,46.45 33.8,44.7 34.9,44.7 36,44.7 36.5,44.2 C5.1
  Bottom Layer w0.5: v1(25.95,50.825) 25.953,50.822 31.097,50.822 31.1,50.82 VR1.2@31.1,53.36
NetC6_2: C6.2 Fuse1.1 L3.2 | length 17.5
  Top Layer w1.3: v1(19.85,42) 19.904,42 20.054,42.15 L3.2 27.125,42.175 C6.2@32.55,42.175
  Bottom Layer w1.3: Fuse1.1 19.15,41.3 v1(19.85,42)
NetC7_1: C7.1 IC1.4 R2.1 | length 15
  Top Layer w0.5: IC1.4 26.05,21.25 26.3,21 26.3,17.7 27.115,16.885 28.546,16.885 28.556,16.875 29.35,16.875 29.65,17.175 29.65,19.857 30.193,20.4 30.8,20.4 R2.1 C7.1@30.9,22.7
NetC8_1: C8.1 IC1.5 R3.1 | length 4.9
  Top Layer w0.5: IC1.5 27.95,22.2 ; R3.1 27.95,20.95 27.95,22.2 ; 27.95,22.225 27.95,22.2 ; C8.1 28,22.225 27.975,22.2 27.95,22.2
NetC9_1: 
NetC11_1: 
NetC11_2: 
NetC12_2: 
NetC14_2: 
NetD5_A: 
NetGREEN1_1: 
NetIC1_1: IC1.1 Q1.1 | length 16.6
  Top Layer w0.5: Q1.1 18.61,17.465 14.875,21.2 14.875,23.107 15.168,23.4 21.1,23.4 21.35,23.15 IC1.1
NetIC1_2: IC1.2 Q2.1 | length 34.6
  Top Layer w0.5: v1(20.715,20.485) 20.906,20.677 20.906,21.476 21.579,22.15 22.4,22.15 IC1.2 ; v1(38,8.725) 39.47,10.195 Q2.1
  Bottom Layer w0.5: v1(20.715,20.485) 20.715,20.756 21.421,21.463 21.421,21.546 21.775,21.9 33.2,21.9 34.5,20.6 34.5,12.225 v1(38,8.725)
NetIC1_3: IC1.3 R4.2 | length 6.6
  Top Layer w0.5: R4.2@19.075,21.05 19.075,20.004 20.093,18.985 21.336,18.985 22.215,19.864 22.215,21.107 22.175,21.146 22.175,21.2 22.4,21.2 IC1.3
NetK1_5: 
NetLDR1_1: 
NetLDR1_2: 
NetP_03: 
NetPi1_4: Pi1.4 Power.01 | length 4.7
  Top Layer w1.3: Pi1.4@4.93,20.95 Pi1.4 4.988,20.94 5.889,20.038 6.487,20.038 v1(6.525,20) ; Power.01@8.79,20.95 Power.01
  Bottom Layer w1.3: v1(6.525,20) 6.579,20 7.504,20.925 8.765,20.925 Power.01
NetPi1_8: Pi1.8 socket1.01 | length 6.3
  Top Layer w0.5: Pi1.8@4.92,26.12 Pi1.8 5.082,26.02 7.087,28.025 v1(7.25,28.025)
  Bottom Layer w0.5: v1(7.25,28.025) 7.521,28.025 7.846,28.35 8.025,28.35 8.465,28.79 8.465,29.665 socket1.01
NetPi1_10: Pi1.10 socket1.02 | length 7.1
  Top Layer w0.5: Pi1.10 5.043,28.56 6.436,29.954 v1(6.559,29.954) ; socket1.02@8.9,32.59 socket1.02
  Bottom Layer w0.5: v1(6.559,29.954) 6.559,32.209 7.05,32.7 8.84,32.7 socket1.02
NetPi1_16: Pi1.16 socket1.03 | length 4.6
  Top Layer w0.5: Pi1.16 5.097,36.003 5.298,36.003 6.4,34.9 v1(6.6,34.9)
  Bottom Layer w0.5: v1(6.6,34.9) 6.74,35.04 8.76,35.04 socket1.03
NetPi1_18: Pi1.18 socket2.01 | length 5.3
  Top Layer w0.5: Pi1.18 5.05,38.72 6.57,37.2 v1(6.7,37.2)
  Bottom Layer w0.5: v1(6.7,37.2) 6.75,37.2 8.75,39.2 socket2.01
NetPi1_22: Pi1.22 socket2.02 | length 4.7
  Top Layer w0.5: Pi1.22 5.11,43.8 6.385,42.525 v1(6.575,42.525)
  Bottom Layer w0.5: v1(6.575,42.525) 6.846,42.525 7.439,41.931 8.609,41.931 socket2.02
NetPi1_36: Pi1.36 socket2.03 | length 19.5
  Top Layer w0.5: Pi1.36 4.92,61.464 7.014,59.371 7.014,53.754 6.602,53.343 v1(6.602,47.456) ; socket2.03 socket2.03@8.8,44.515
  Bottom Layer w0.5: v1(6.602,47.456) 6.602,47.186 7.35,46.438 7.35,45.73 socket2.03
NetQ1_2: Q1.4 Q2.4 | length 7.9
  Top Layer w2: Q1.4 Q2.4
NetQ3_1: 
NetR1_2: R1.2 U1.5 VR1.3 | length 10.7
  Top Layer w0.5: v1@26.57,59.793 U1.5@26.57,62.028 ; v1@26.863,59.5 R1.2
  Bottom Layer w0.5: v1(26.575,59.675) 26.575,58.175 28.85,55.9 VR1.3@31.1,55.9
NetR5_2: 
NetR7_1: 
NetR9_2: 
NetR_03: 
NetS1_03: 
NetS2_03: 
Netsocket1_01: 
Netsocket1_02: 
Netsocket1_03: 
Netsocket2_01: 
Netsocket2_02: 
Netsocket2_03: 
NetU3_29: 
pads on no net: "power 1.2" "power 1.3" "power 1.4" Pi1.1 Pi1.2 Pi1.3 Pi1.5 Pi1.7 Pi1.9 Pi1.11 Pi1.12 Pi1.13 Pi1.14 Pi1.15 Pi1.17 Pi1.19 Pi1.20 Pi1.21 Pi1.23 Pi1.24 Pi1.25 Pi1.26 Pi1.27 Pi1.28 Pi1.29 Pi1.30 Pi1.31 Pi1.32 Pi1.33 Pi1.34 Pi1.35 Pi1.37 Pi1.38 Pi1.39 Pi1.40

## Other copper
Top Layer:
  text "Designed by" at 15.775,35.191 h2
  text "FKI Edam" at 33.525,30.775 h2

## Silkscreen, mask and mechanical layers (free items; w line width, h text height)
Mechanical 1:
  circle w0.254: c52.5,13.5 r1.5
  circle w0.254: c52.5,71.5 r1.5
  lines w0.254: 34,55.5 cw(c35.5,55.5) 35.5,57 52.5,57 cw(c52.5,55.5) 54,55.5 cw(c52.5,55.5) 52.5,54 35.5,54 cw(c35.5,55.5) 34,55.5